# EAGLE board SOT363_2xSOT23 (EAGLE 6.4)
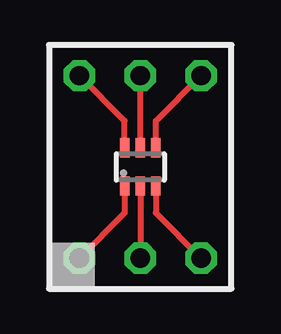
[diagram p0: board, top side]
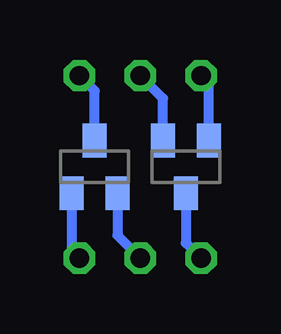
[diagram p1: board, bottom side, seen from below]

No outline drawn. Coordinates in mm, seen from the top.
Copper layers (1*16): Top 0.035mm / dielectric 1.5mm / Bottom 0.035mm
Design rules "default": minimum track width 10mil, minimum drill 0.6mm, track to track 8mil, track to pad 8mil, pad to pad 8mil, via to via 8mil, smd to smd 8mil, copper to edge 40mil, drill to drill 8mil, minimum pad ring 10mil, minimum via ring 8mil, stop-mask expansion 4mil, vias tented up to drill 0mil, thermal gap 10mil
Net classes: 1 pwr: width 0.254 mm

## Footprints (pad centres in the part's own frame; a part is rotated, then mirrored left to right if it is on the bottom)
SOT363_PHILIPS = smd 0.4 x 0.8: 1 -0.65,-0.8; 2 0,-0.8; 3 0.65,-0.8; 4 0.65,0.8; 5 0,0.8; 6 -0.65,0.8
1 = drill 0.8 octagon: P$1 0,0
SOT23B-3 = smd 1 x 1.4: 1 -0.95,-1.1; 2 0.95,-1.1; 3 0,1.1

## Placement (x,y rotation side)
E$614  [SOT363_PHILIPS]  3.81,5.08 0 top
E$616  [1]  1.27,8.89 0 top
E$617  [1]  3.81,8.89 0 top
E$618  [1]  6.35,8.89 0 top
E$619  [1]  1.27,1.27 0 top
E$620  [1]  3.81,1.27 0 top
E$621  [1]  6.35,1.27 0 top
E$622  [SOT23B-3]  1.91,5.08 180 bottom
E$623  [SOT23B-3]  5.71,5.08 0 bottom

## Library data of the parts
E$614 = diode
E$616-E$621 = drill
E$622 E$623 = ref-packages

## Nets
S$294 [pwr]: E$614.1 E$619.P$1 E$622.3
S$297 [pwr]: E$614.2 E$620.P$1 E$623.2
S$299 [pwr]: E$614.3 E$621.P$1 E$623.1
S$300 [pwr]: E$614.4 E$618.P$1 E$623.3
S$301 [pwr]: E$614.5 E$617.P$1 E$622.2
S$302 [pwr]: E$614.6 E$616.P$1 E$622.1

## Tracks (layer width: path | path; a pad name or v marks a point on that pad's centre or on a via)
S$294
  Top 0.254: E$614.1 3.16,3.16 E$619.P$1
  Bottom 0.406: E$622.3 1.91,1.91 E$619.P$1
S$297
  Top 0.254: E$614.2 E$620.P$1
  Bottom 0.406: E$623.2 4.76,2.23 E$620.P$1
S$299
  Top 0.254: E$614.3 4.46,3.16 E$621.P$1
  Bottom 0.406: E$623.1 6.67,1.58 E$621.P$1
S$300
  Top 0.254: E$614.4 4.46,7 E$618.P$1
  Bottom 0.406: E$623.3 5.71,8.26 E$618.P$1
S$301
  Top 0.254: E$614.5 E$617.P$1
  Bottom 0.406: E$622.2 2.85,7.93 E$617.P$1
S$302
  Top 0.254: E$614.6 3.16,7 E$616.P$1
  Bottom 0.406: E$622.1 0.95,8.57 E$616.P$1